# EAGLE board 4Relay_Chair_Control (EAGLE 6.6.0)
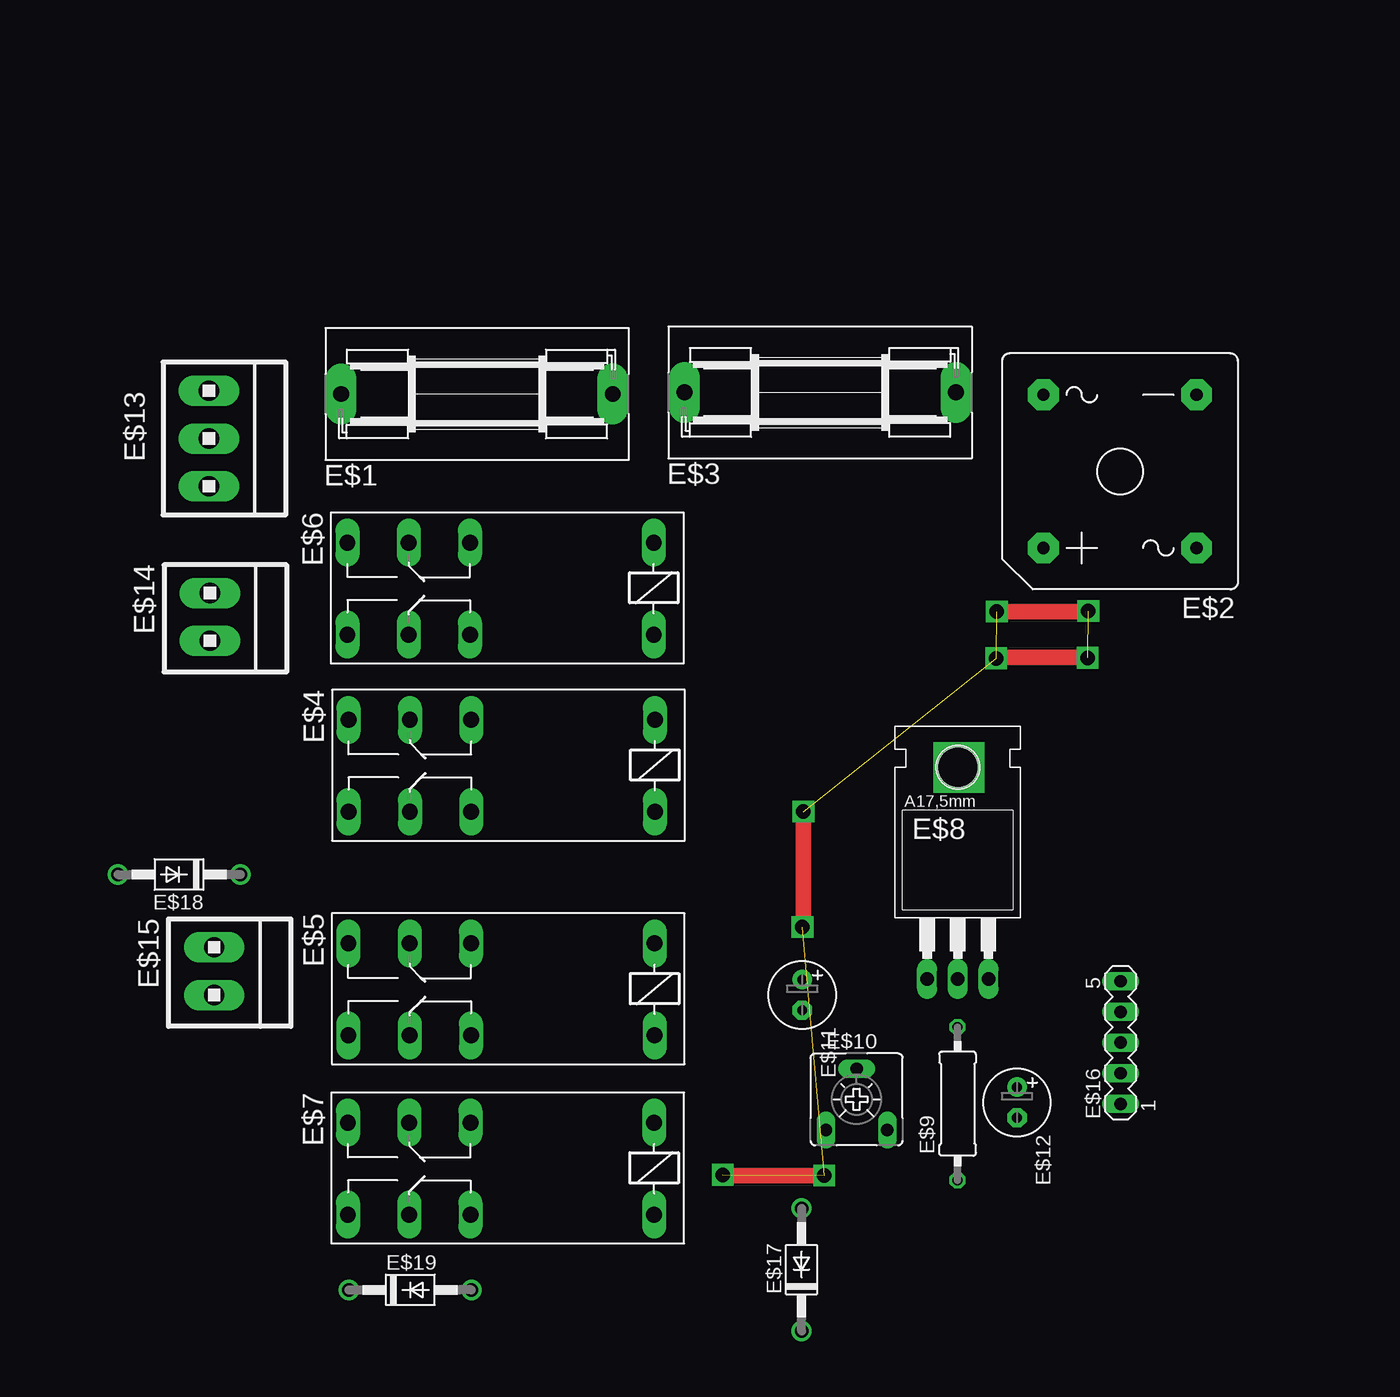
[diagram p0: board, top side]
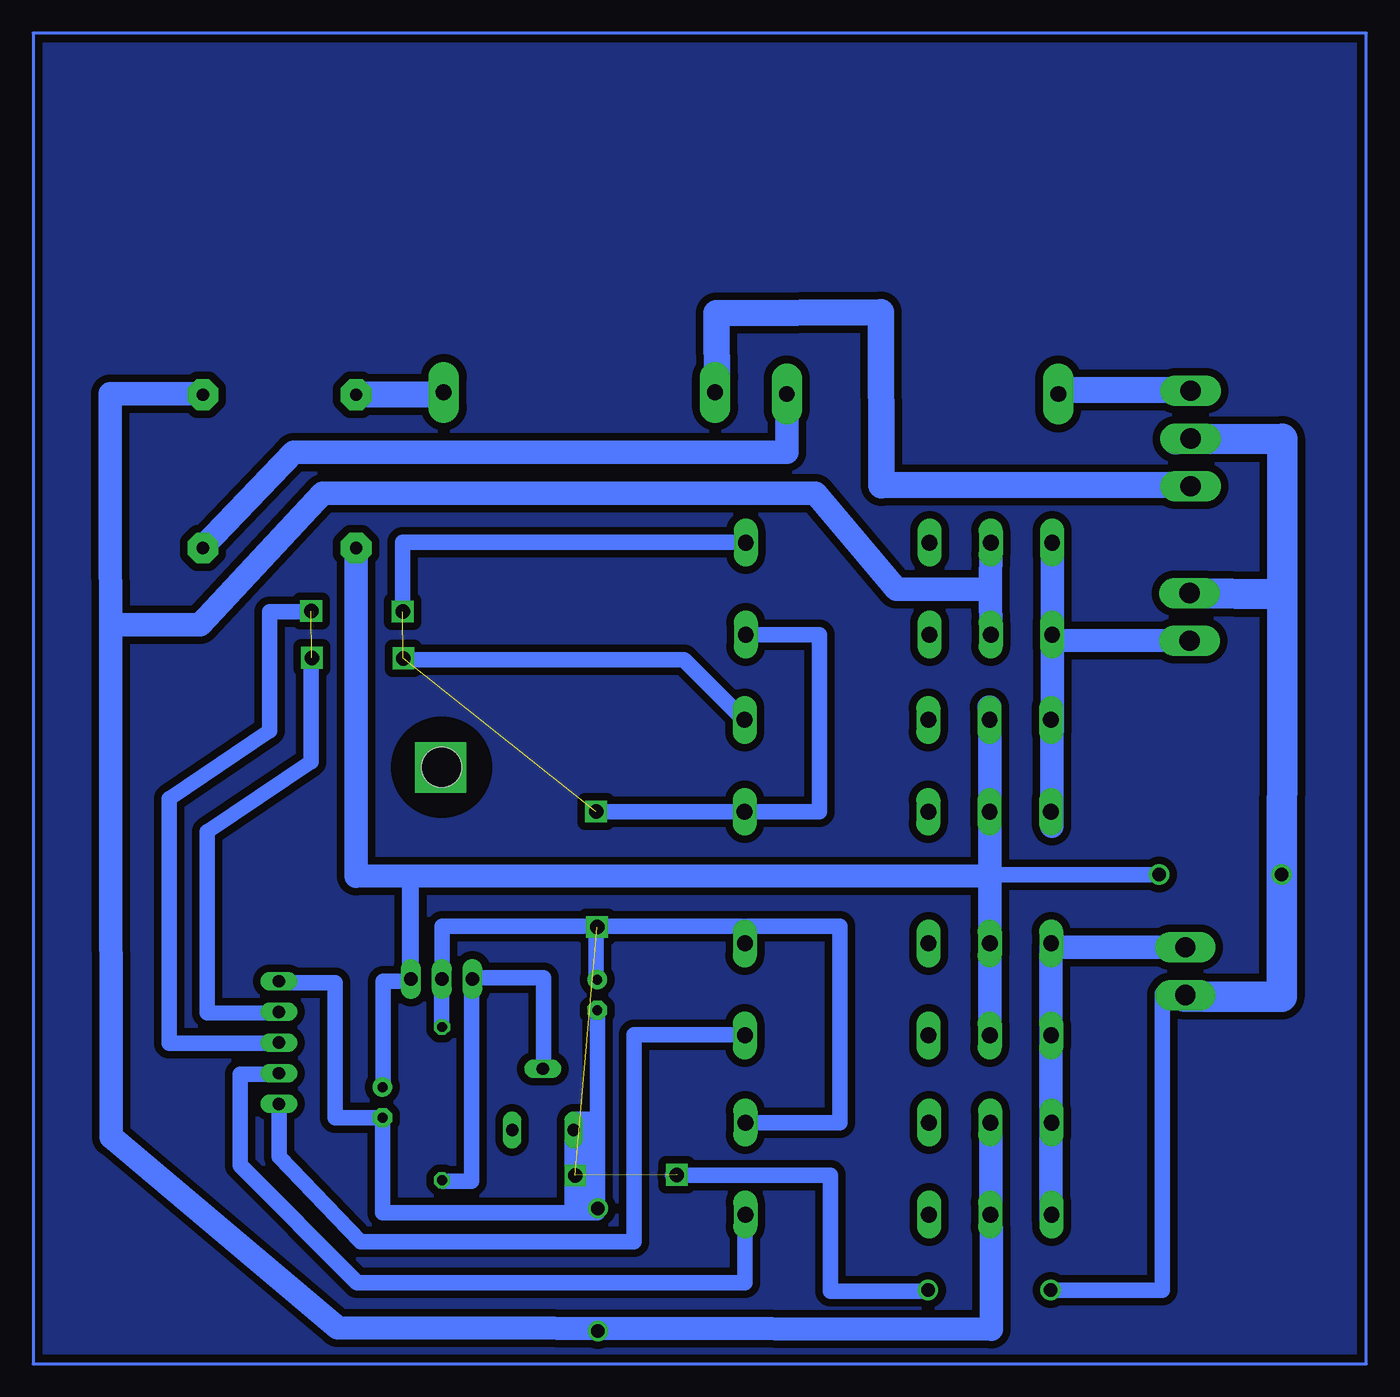
[diagram p1: board, bottom side, seen from below]

No outline drawn. Coordinates in mm, seen from the top.
Copper layers (1*16): Top 0.035mm / dielectric 1.5mm / Bottom 0.035mm
Design rules "default *": minimum track width 10mil, minimum drill 24mil, track to track 25mil, track to pad 25mil, pad to pad 25mil, via to via 25mil, smd to smd 25mil, copper to edge 40mil, drill to drill 8mil, minimum pad ring 10mil, minimum via ring 8mil, stop-mask expansion 4mil, vias tented up to drill 0mil, thermal gap 10mil

## Footprints (pad centres in the part's own frame; a part is rotated, then mirrored left to right if it is on the bottom)
SH22,5A = drill 1.321 pad 2.54 long: 1 -11.252,0; 2 11.252,0
GBPC8 = drill 1.016 pad 2.54 octagon: + 6.35,6.35; - -6.35,-6.35; AC1 -6.35,6.35; AC2 6.35,-6.35
F4052 = drill 1.321 long: 1 -3.81,3.81; 2 -3.81,-3.81; O1 11.43,-3.81; O2 11.43,3.81; P1 16.51,-3.81; P2 16.51,3.81; S1 21.59,-3.81; S2 21.59,3.81
TO220 = drill 1.118 long: 1 -2.54,-6.35; 2 0,-6.35; 3 2.54,-6.35 | hole 3.302: 0,11.176
0309/12 = drill 0.813 octagon: 1 -6.35,0; 2 6.35,0
CA6V = drill 1.016 long: A -2.54,-2.54; E 2.54,-2.54; S 0,2.54
E2,5-6 = drill 0.813 pad 1.6: + -1.27,0 | drill 0.813 pad 1.6 octagon: - 1.27,0
1X3MTA = drill 1.676 long: 1 3.937,0; 2 -0.025,0; 3 -3.988,0
1X2MTA = drill 1.676 long: 1 1.981,0; 2 -1.981,0
MA05-1 = drill 1.016 long: 1 -5.08,0; 2 -2.54,0; 3 0,0; 4 2.54,0; 5 5.08,0
DO41-10 = drill 1.118: A 5.08,0; C -5.08,0

## Placement (x,y rotation side)
E$1  [SH22,5A]  36.8,80.38 0 top
E$2  KBPC1010  [GBPC8]  90.11,73.96 180 top
E$3  [SH22,5A]  65.24,80.51 0 top
E$4  [F4052]  47.74,49.56 180 top
E$5  [F4052]  47.72,31.03 180 top
E$6  [F4052]  47.64,64.25 180 top
E$7  [F4052]  47.68,16.17 180 top
E$8  LM350  [TO220]  76.66,38.25 0 top
E$9  [0309/12]  76.64,21.56 90 top
E$10  [CA6V]  68.27,21.91 0 top
E$11  [E2,5-6]  63.76,30.57 270 top
E$12  [E2,5-6]  81.57,21.66 270 top
E$13  [1X3MTA]  14.57,76.66 270 top
E$14  [1X2MTA]  14.65,61.9 270 top
E$15  [1X2MTA]  15.01,32.54 270 top
E$16  [MA05-1]  90.15,26.62 90 top
E$17  [DO41-10]  63.7,7.8 90 top
E$18  [DO41-10]  12.1,40.55 180 top
E$19  [DO41-10]  31.26,6.12 0 top

## Library data of the parts
E$1 E$3 = fuse
E$2 = rectifier
E$4-E$7 = relay
E$8 = ref-packages
E$9 E$11 E$12 = rcl
E$10 = pot
E$13-E$15 = con-amp
E$16 = con-lstb
E$17-E$19 = diode

## Tracks (layer width: path | path; a pad name or v marks a point on that pad's centre or on a via)
S$1
  Bottom 0.254: 0,0 0,110.28 110.53,110.28 110.53,0 0,0
S$2
  Bottom 2.184: 25.46,79.39 25.46,80.67 13.93,80.72
S$3
  Bottom 2.184: 14.01,72.84 40.19,72.82 40.24,87.14 53.88,87.08 53.83,80.24
S$4
  Bottom 2.184: 76.48,80.34 83.76,80.3 83.76,80.33
S$5
  Bottom 1.93: 48.04,80.46 48.04,75.57 88.92,75.57 96.54,67.64
S$6
  Bottom 1.93: 31.2,27.06 31.2,54.43 31.27,54.43
S$7
  Bottom 1.93: 26.06,44.54 26.02,59.96 | 26.01,68.38 26.02,59.96 | 26.02,59.96 14.52,59.94
S$8
  Bottom 1.93: 15.04,34.53 26.17,34.53 26.17,12
S$9
  Bottom 1.93: 31.29,40.44 83.76,40.42 83.76,67.72
S$10
  Bottom 2.54: 15.8,76.61 6.97,76.66 6.97,63.78 | 15.06,63.86 6.97,63.78 | 6.97,63.78 7.02,30.42 15.03,30.42
S$11
  Bottom 1.93: 96.55,80.41 104.14,80.41 104.06,18.77
S$12
  Bottom 1.93: 103.92,61.25 96.69,61.25 86.53,72.17 45.68,72.17 38.94,64.19 31.15,64.19 | 31.15,64.19 31.12,67.9 | 31.15,64.19 31.12,60.27
S$13
  Bottom 1.93: 31.1,2.88 31.11,19.97
S$14
  Bottom 1.93: 31.08,2.88 85.3,2.99 104.08,18.8
S$15
  Bottom 1.422: 79.24,31.75 79.24,40.37
S$16
  Bottom 1.27: 76.6,15.12 74.19,15.12 74.19,31.95
S$17
  Bottom 1.27: 76.65,27.9 76.68,27.9 76.68,32
S$18
  Bottom 1.27: 76.63,31.9 76.63,36.25 43.62,36.25 43.62,19.97 51.52,19.97
S$19
  Top 1.27: 63.85,36.33 63.85,45.79 63.78,45.79
S$20  (via drill 1.2)  (2 unrouted)
  other vias: 63.86,45.77 79.9,62.35 79.85,58.47
S$21
  Bottom 1.27: 63.91,45.77 45.32,45.77 45.32,60.43 51.54,60.43 51.54,60.52
S$22  (via drill 1.2)  (2 unrouted)
  other vias: 63.78,36.19 65.59,15.61 57.17,15.66
S$23
  Bottom 1.27: 68.23,24.44 68.23,32.01 74.21,32.01
S$24
  Bottom 1.27: 63.85,36.14 63.85,31.76
S$25
  Bottom 1.27: 81.53,23.01 81.53,31.69 79.24,31.69
S$26
  Bottom 1.27: 63.73,29.31 63.73,19.31 65.79,19.31
S$27
  Bottom 1.27: 81.56,20.41 81.54,12.53 63.74,12.53 63.74,19.47
S$28  (via drill 3.2)
  other vias: 76.74,49.42
S$29
  Bottom 1.27: 81.48,20.41 85.5,20.41 85.5,31.57 90.05,31.57
S$30
  Bottom 1.27: 51.51,27.25 60.72,27.25 60.72,10.1 83.39,10.1 90.12,17.16 90.12,21.62
S$31
  Bottom 1.27: 51.53,12.44 51.53,6.73 83.67,6.73 93.39,16.45 93.39,24.01 89.3,24.01
S$32  (via drill 1.2)  (1 unrouted)
  other vias: 87.48,62.39 87.43,58.51
S$33
  Top 1.27: 79.92,62.35 87.54,62.35
S$34
  Top 1.27: 79.87,58.56 87.59,58.56
S$35
  Bottom 1.27: 89.74,29.05 96.12,29.08 96.12,44.09 87.5,49.89 87.5,58.58
S$36
  Bottom 1.27: 89.33,26.57 99.24,26.57 99.24,46.84 90.93,52.48 90.93,62.35 87.48,62.35
S$37
  Bottom 1.27: 51.47,68.11 79.91,68.11 79.91,62.09
S$38
  Bottom 1.27: 79.84,58.36 56.58,58.36 51.47,53.25
S$39
  Bottom 1.27: 17.23,40.52 33.68,40.52
S$40
  Top 1.27: 65.65,15.59 57.09,15.6
S$41
  Bottom 1.27: 36.35,6.03 44.41,6.03 44.41,15.62 57.54,15.62
S$42
  Bottom 1.27: 26.25,6.09 16.91,6.09 16.91,30.67
S$43
  pour Bottom: 0.01,0 0.01,110.27 109.28,110.27 110.54,110.27 110.54,0
(copper drawn outside any net)
  shapes: Bottom area x2